# Altium PCB Main_Controller.PcbDoc (part 1 of 2)
Units mil, origin at the board's own origin, x right, y up, seen from the top; angles counter-clockwise.
Board outline 1790 x 1950 mil, 2 copper layers (Top Layer, Bottom Layer); 84 components, 64 nets, 348 pads, 50 vias.
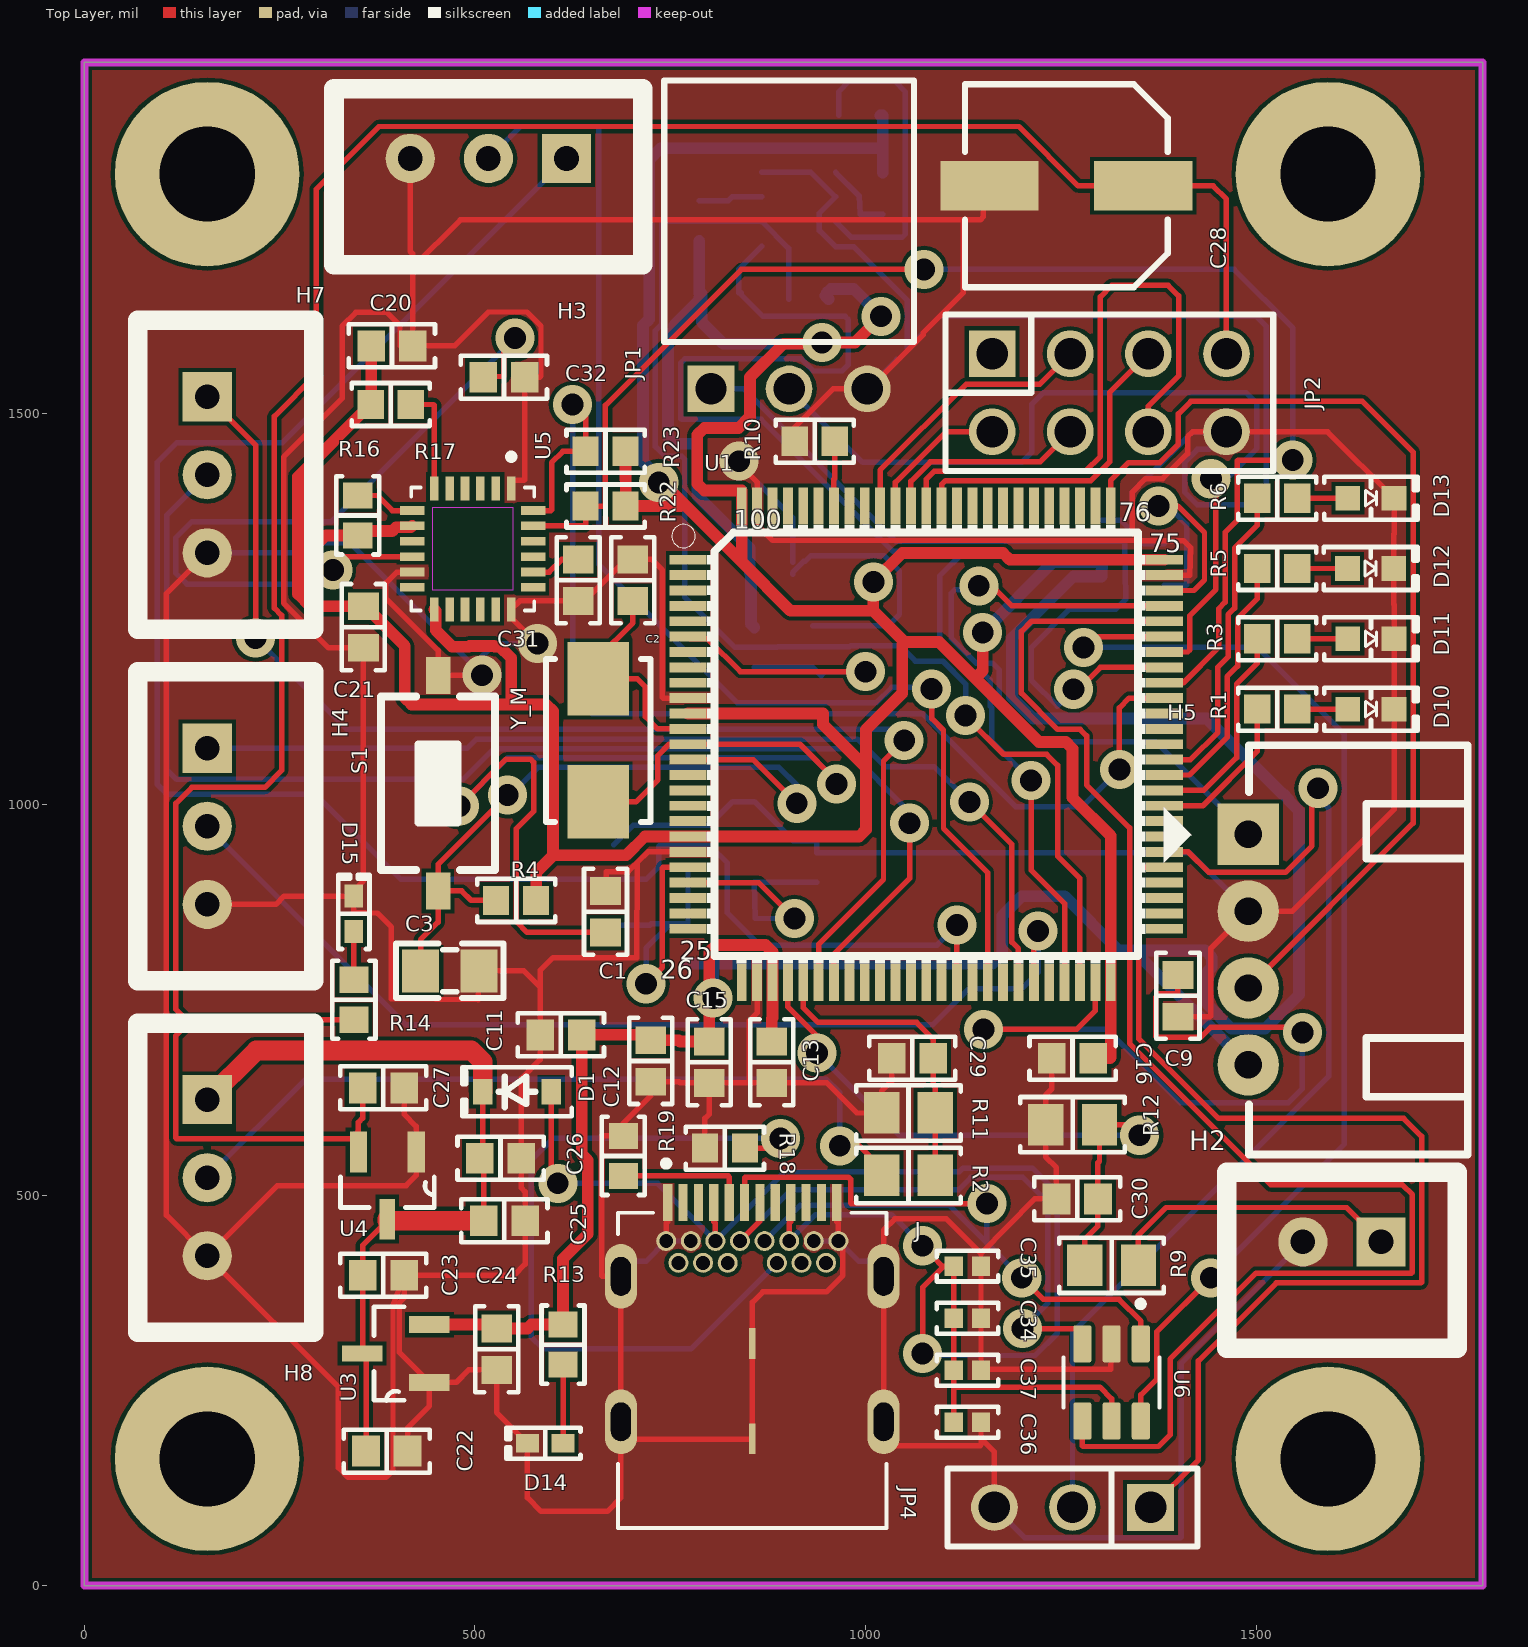
[diagram p0: Top Layer view]
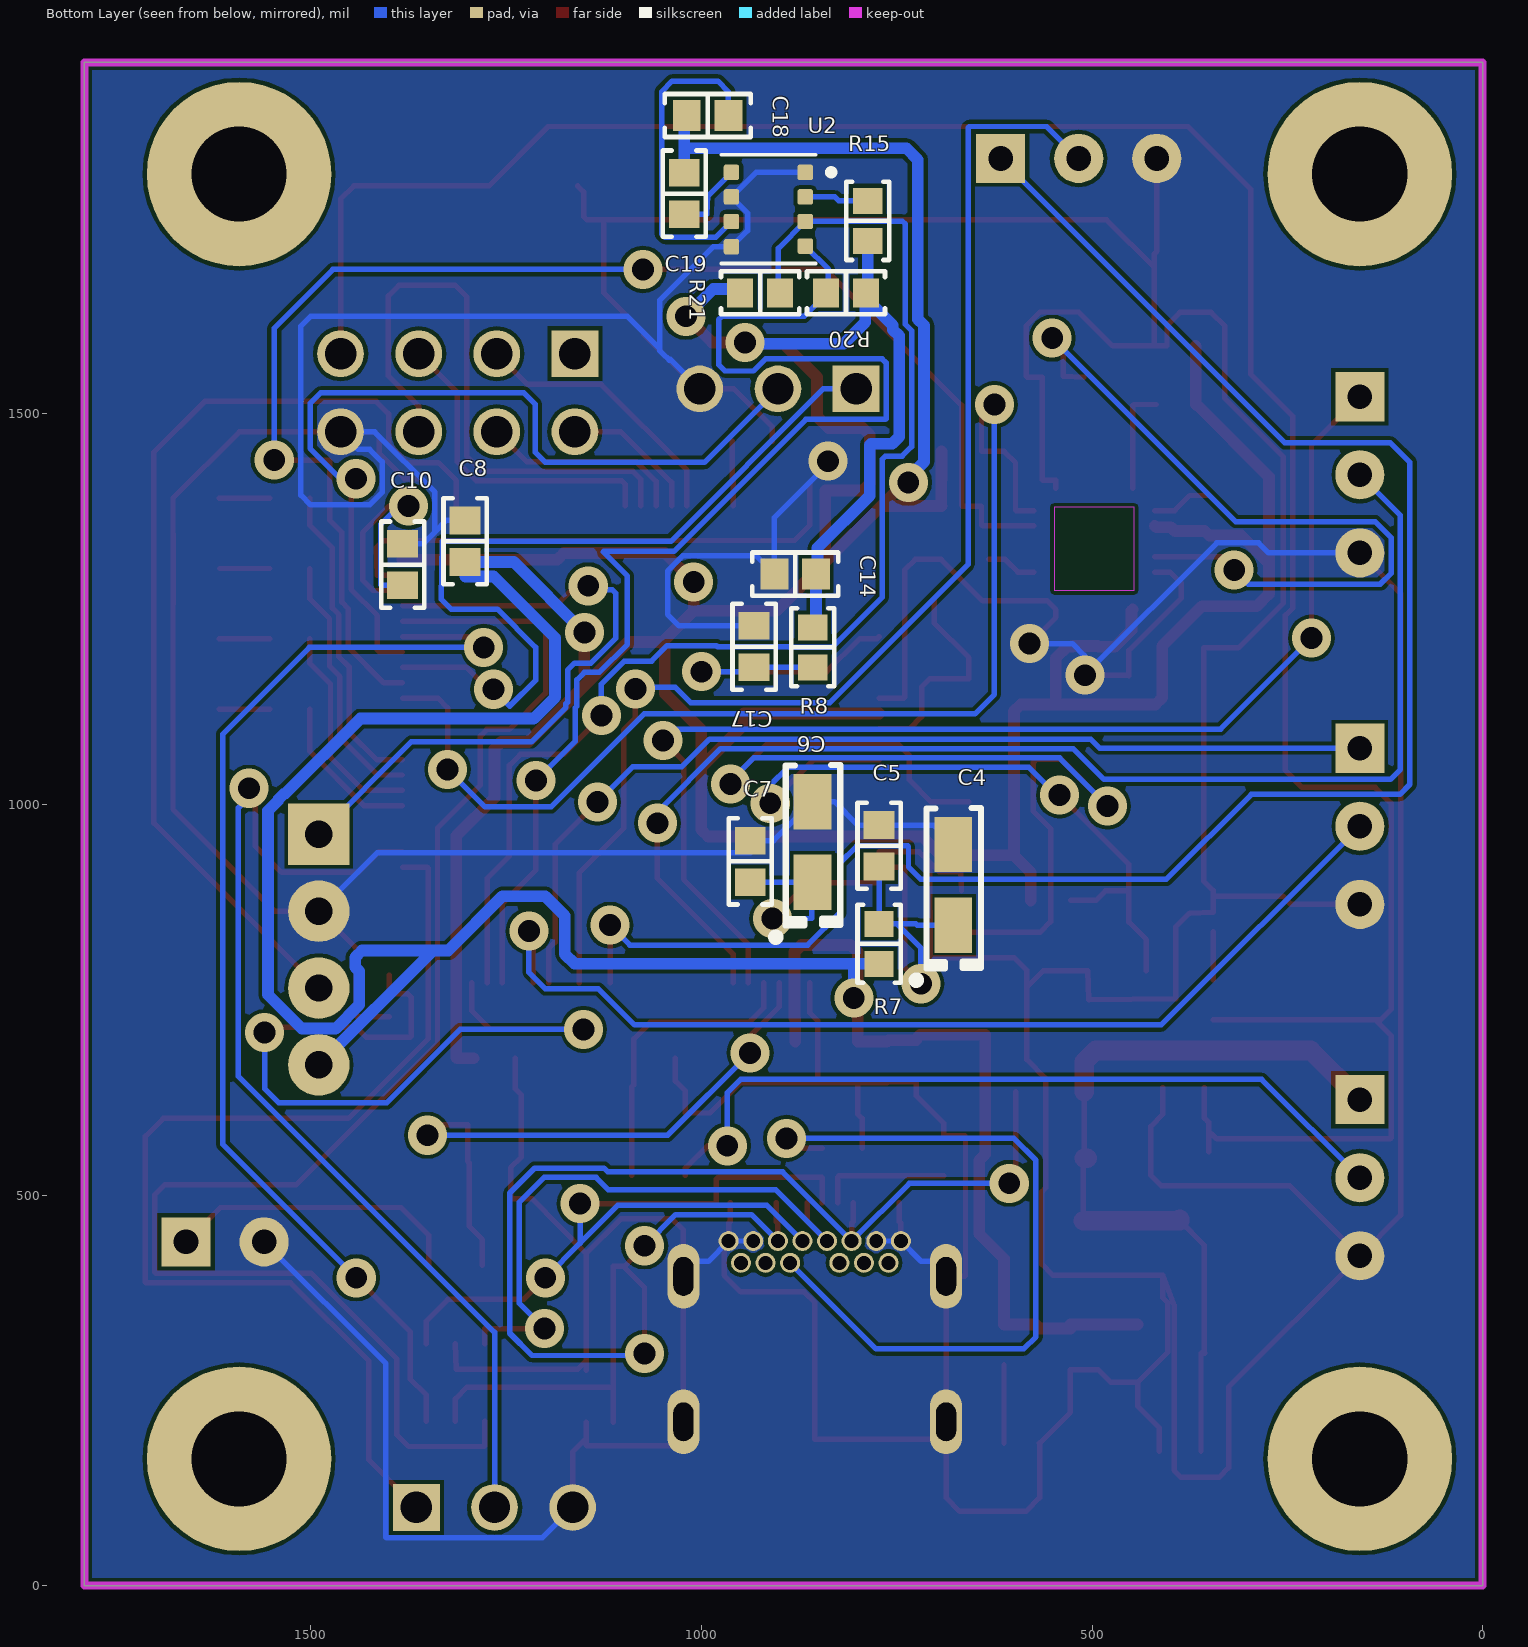
[diagram p1: Bottom Layer view, seen from below]
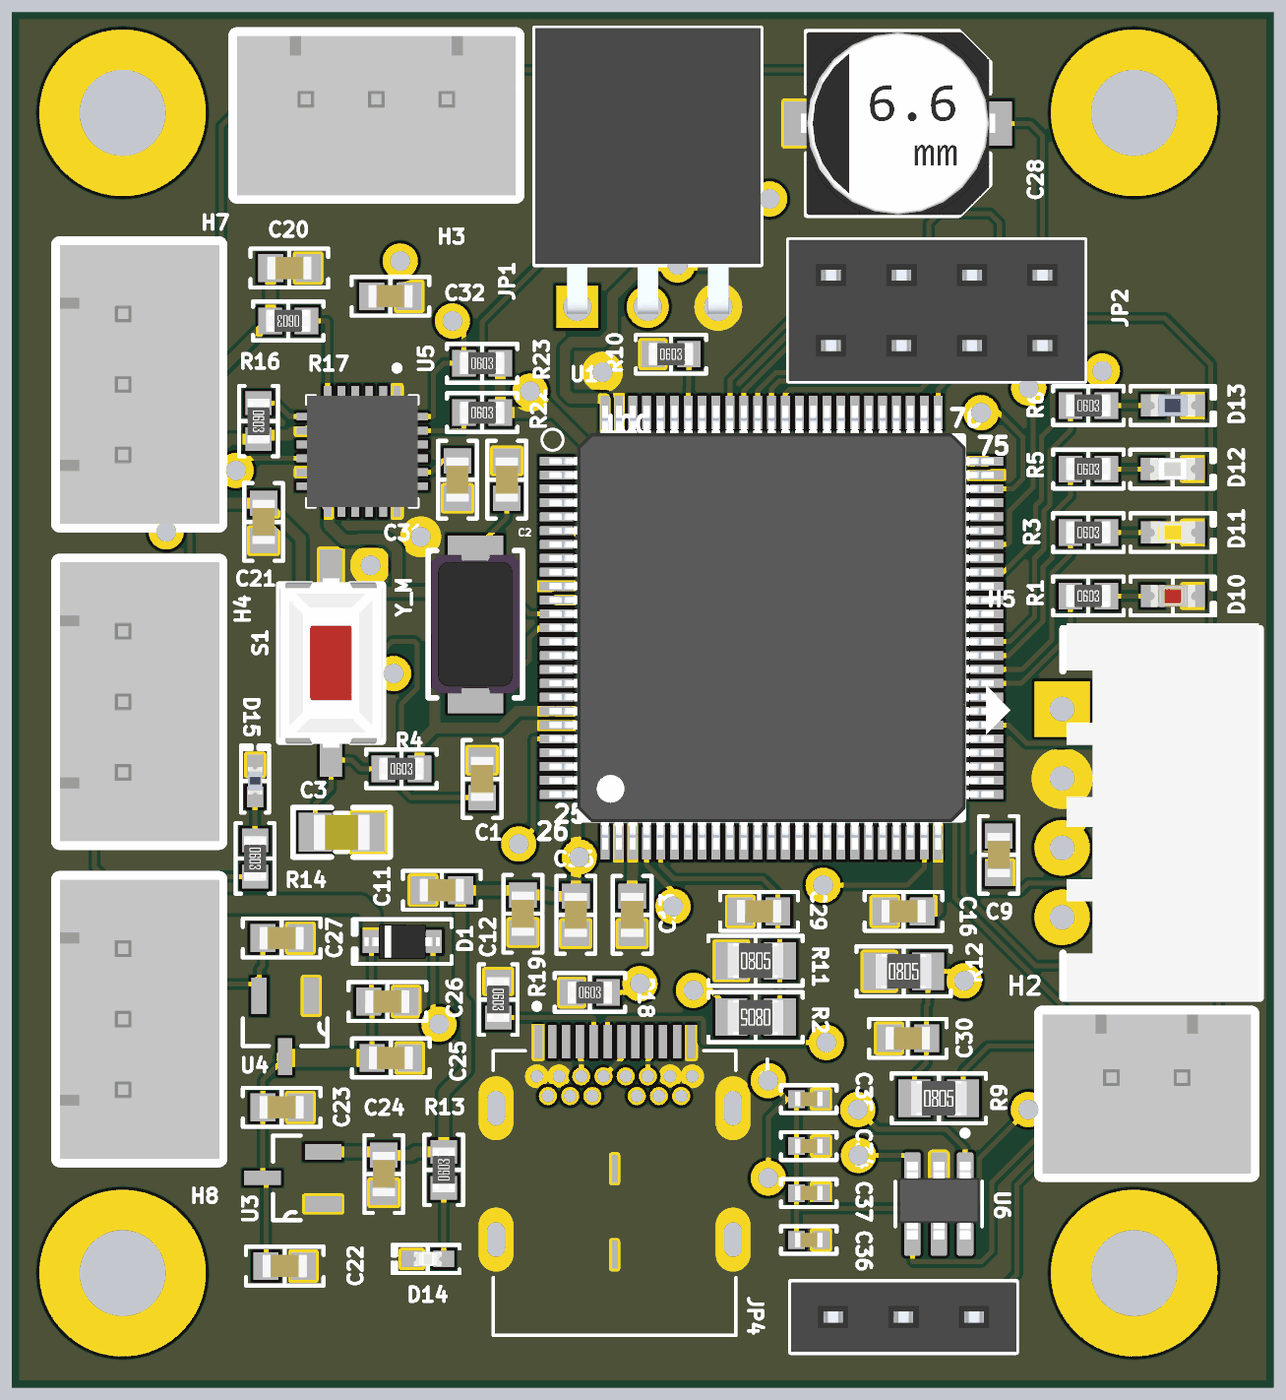
[diagram p2: 3D render of the assembled board from above, using the file's embedded part models]
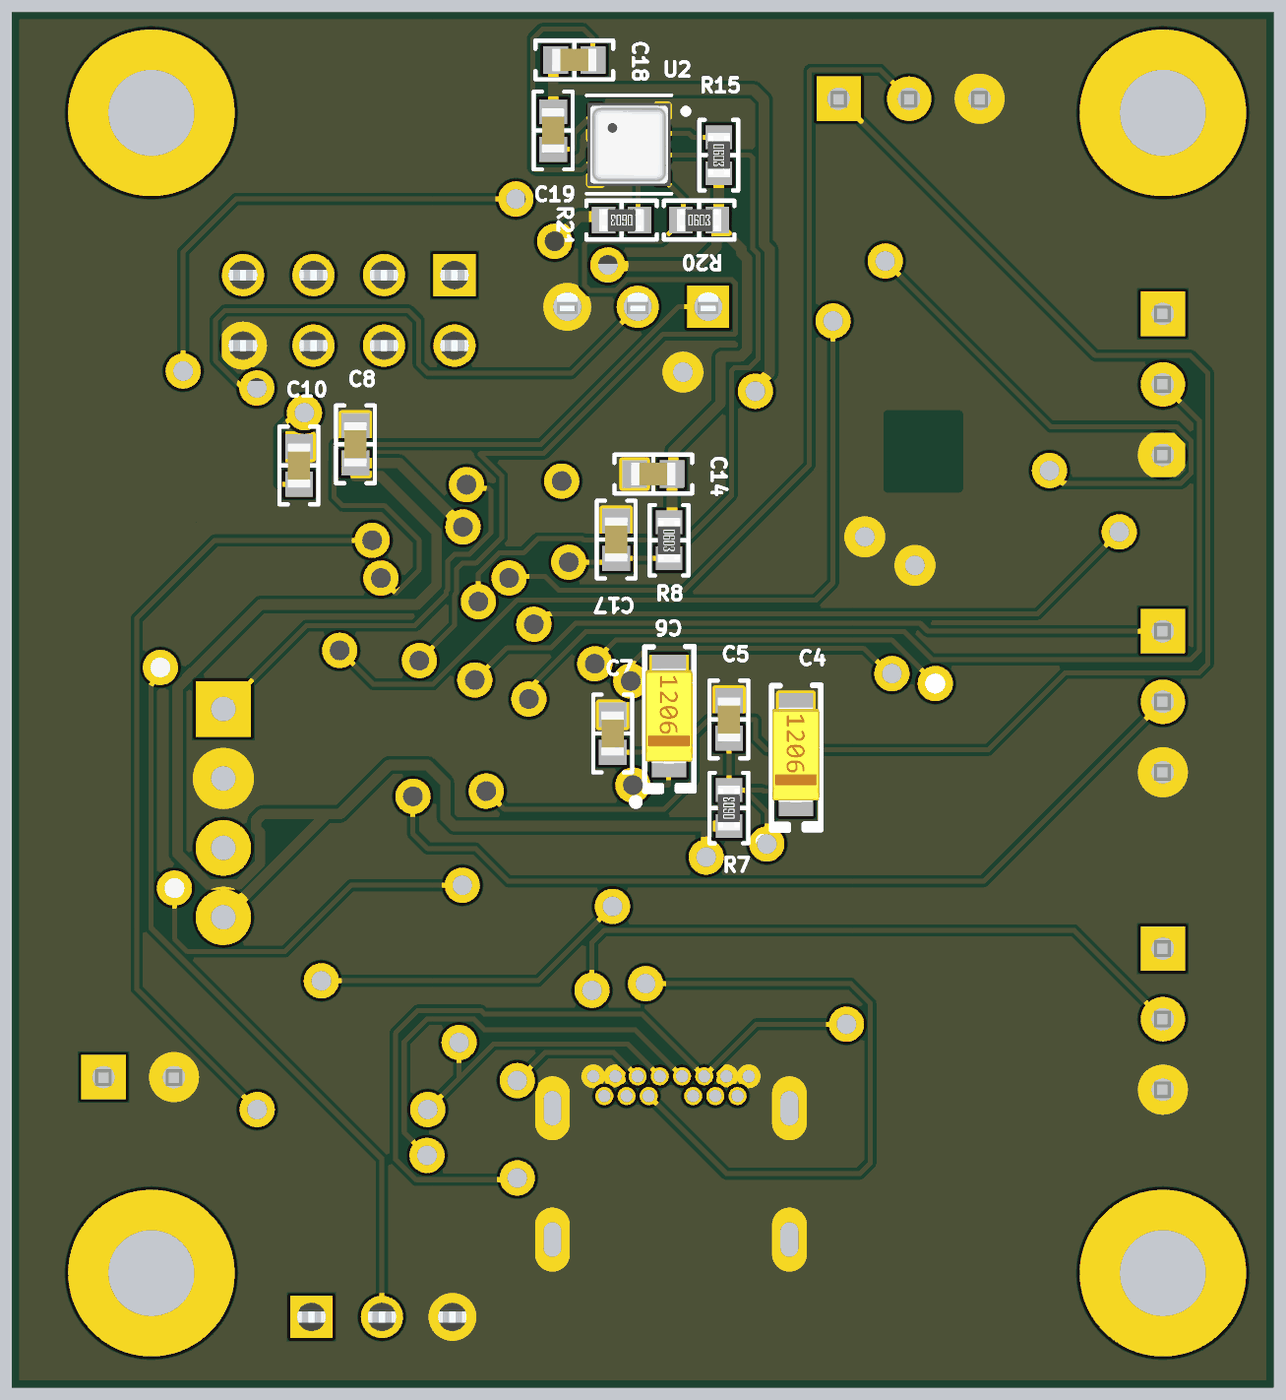
[diagram p3: 3D render of the assembled board from below, using the file's embedded part models]

## Layer stack, top to bottom
Top Solder: solder mask 0.4, Solder Resist, Dk 3.5
Top Layer: signal copper 1.4
Dielectric 1: dielectric 12.6, FR-4, Dk 4.8
Bottom Layer: signal copper 1.4
Bottom Solder: solder mask 0.4, Solder Resist, Dk 3.5

## Board outline
0,0 0,1950 1790,1950 1790,0

## Design rules (kind name [scope] priority, off if disabled: settings)
Clearance [All] p1: gap=5 ignorepadtopadclearanceinfootprint=FALSE
PolygonConnect PolygonConnect_2 [All vs IsNamedPolygon('GND_L02_P001')] p1: connectstyle=Direct reliefconductorwidth=10 reliefentries=4 polygonreliefangle="90 Angle" airgapwidth=10
PolygonConnect PolygonConnect_1 [All vs IsNamedPolygon('GND_L01_P000')] p2: connectstyle=Direct reliefconductorwidth=10 reliefentries=4 polygonreliefangle="90 Angle" airgapwidth=10
PolygonConnect [All] p3: connectstyle=Relief reliefconductorwidth=10 reliefentries=4 polygonreliefangle="90 Angle" airgapwidth=10
RoutingVias [All] p1: holewidth=28 width=50 viastyle="Through Hole" minholewidth=28 minwidth=50 maxholewidth=28 maxwidth=50
SolderMaskExpansion [All] p1: expansion=4 istentingtop=FALSE
Width [All] p1: maxlimit=30 minlimit=7 preferedwidth=7 minimp=50.000000 maximp=50.000000 favimp=50.000000
30 further rules are at their usual default settings.

## Classes and differential pairs
component class Sensor: C18 C19 C20 C21 C31 C32 C34 C35 C36 C37 D1 J R15 R16 R17 R18 R19 R20 R21 R22 R23 U2 U5 U6
component class Power_Supply: C22 C23 C24 C25 C26 C27 D14 D15 R13 R14 U3 U4
component class MCU: C1 C2 C3 C4 C5 C6 C7 C8 C9 C10 C11 C12 C14 C15 C16 C17 C29 C30 D10 D11 D12 D13 R1 R2 R3 R4 R5 R6 R7 R8 R9 R10 R11 R12 S1 U1 Y_M
component class Connector: C28 H2 H3 H4 H5 H7 H8 JP1 JP2 JP4

## Components (designator, comment, footprint, x,y, rotation, side; value= is the part's Value field where it differs from the comment)
C1 "20 pF" "CAP 0603_1608" 667.11,862.72 r270 top
C2 "20 pF" "CAP 0603_1608" 702.11,1287.11 r270 top
C3 "20pF" "tu 0805" 467.7,787.11 r0 top
C4 "1µF" "CAP POL 1206_3216" 677.7,897.11 r90 bottom
C5 "0.1 µF" "CAP 0603_1608" 772.7,947.11 r270 bottom
C6 "1µF" "CAP POL 1206_3216" 857.7,952.11 r90 bottom
C7 "0.1 µF" "CAP 0603_1608" 937.7,927.11 r90 bottom
C8 "0.1 µF" "CAP 0603_1608" 1302.7,1337.11 r270 bottom
C9 "2.2 µF" "CAP 0603_1608" 1400,755 r90 top
C10 "2.2 µF" "CAP 0603_1608" 1382.7,1307.11 r270 bottom
C11 "=Value" "CAP 0603_1608" 610,705 r0 top
C12 "0.1 µF" "CAP 0603_1608" 725,671.57 r90 top
C13 "=Value" "CAP 0603_1608" 880,670 r90 top
C14 "=Value" "CAP 0603_1608" 880,1295 r180 bottom
C15 "0.1 µF" "CAP 0603_1608" 800,670 r90 top
C16 "0.1 µF" "CAP 0603_1608" 1265,675 r0 top
C17 "1 µF" "CAP 0603_1608" 932.7,1202.11 r270 bottom
C18 "0.1 µF" "CAP 0603_1608" 992.11,1882.11 r0 bottom
C19 "0.1 µF" "CAP 0603_1608" 1022.11,1782.11 r90 bottom
C20 "0.1 µF" "CAP 0603_1608" 393.69,1587.11 r180 top
C21 "0.1 µF" "CAP 0603_1608" 357.11,1227.11 r270 top
C22 "10 µF" "CAP 0603_1608" 387.08,172.11 r180 top
C23 "0.1µF" "CAP 0603_1608" 382.7,397.11 r180 top
C24 "10 µF" "CAP 0603_1608" 527.7,302.61 r90 top
C25 "10 µF" "CAP 0603_1608" 537.7,467.11 r180 top
C26 "0.1µF" "CAP 0603_1608" 532.7,547.11 r180 top
C27 "10 µF" "CAP 0603_1608" 382.7,637.11 r180 top
C28 "220 µF" "CAP ALSMD 6.6MM H6.1MM" 1257.11,1792.11 r180 top
C29 "0.1 µF" "CAP 0603_1608" 1060,675 r0 top
C30 "0.1 µF" "CAP 0603_1608" 1271.02,495 r0 top
C31 "220 pF" "CAP 0603_1608" 632.11,1287.11 r90 top
C32 "0.1 µF" "CAP 0603_1608" 537.11,1547.11 r180 top
C34 "0.1 µF" "CAP 0402_1005" 1130.54,342.25 r0 top
C35 "0.1 µF" "CAP 0402_1005" 1130.54,408.87 r0 top
C36 "0.1 µF" "CAP 0402_1005" 1130.54,209.02 r0 top
C37 "0.1 µF" "CAP 0402_1005" 1130.54,275.63 r0 top
D1 "BAT60JFILM" SOD323 553.86,632.11 r180 top
D10 "Red" "LED 0603_1608 RED" 1647.11,1122.11 r0 top
D11 "Yellow" "LED 0603_1608 YELLOW" 1647.11,1212.11 r0 top
D12 "Green" "LED 0603_1608 GREEN" 1646.64,1302.11 r0 top
D13 "Blue" "LED 0603_1608 BLUE" 1647.11,1392.11 r0 top
D14 "Yellow" "LED 0402_1005 YELLOW" 590.06,182.11 r180 top
D15 "Blue" "LED 0402_1005 BLUE" 345,860 r90 top
H2 "Header 2P 2.54 Duc Thang" XH2.54M-2 1660,440 r180 top
H3 "Header 3P 2.54 Duc Thang" XH2.54M-3 617.11,1827.11 r180 top
H4 "Header 3P 2.54 Duc Thang" XH2.54M-3 157.11,1072.11 r270 top
H5 "Header 4P 2.54 Duc Cong" "Header 4P DC 2.54" 1491,960.85 r0 top
H7 "Header 3P 2.54 Duc Thang" XH2.54M-3 157.11,1522.11 r270 top
H8 "Header 3P 2.54 Duc Thang" XH2.54M-3 157.11,622.11 r270 top
J "SS-52400-002" BELFUSE_SS-52400-002 855,209.61 r0 top
JP1 "JP 1x3 2.54" "JP 1x3 CC" 902.11,1532.11 r0 top
JP2 "JP 2x4 2.54" "JP 2x4 CT" 1312.11,1527.11 r0 top
JP4 "JP 1x3 2.54" "JP 1x3 CT" 1365,100 r180 top
R1 "680 Ohms" "RES 0603_1608" 1527.11,1122.11 r0 top
R2 "33 kOhms" "RES 0805_2012" 1055,525 r180 top
R3 "680 Ohms" "RES 0603_1608" 1527.11,1212.11 r0 top
R4 "10 kOhms" "RES 0603_1608" 552.7,877.11 r0 top
R5 "680 Ohms" "RES 0603_1608" 1527.11,1302.11 r0 top
R6 "680 Ohms" "RES 0603_1608" 1527.11,1392.11 r0 top
R7 "47 Ohms" "RES 0603_1608" 772.7,821.52 r90 bottom
R8 "0 Ohms" "RES 0603_1608" 857.7,1201.13 r270 bottom
R9 "47.5 kOhms" "RES 0805_2012" 1315,410 r0 top
R10 "10 kOhms" "RES 0603_1608" 935,1465 r0 top
R11 "10 kOhms" "RES 0805_2012" 1055,605 r0 top
R12 "10 kOhms" "RES 0805_2012" 1265.1,590 r0 top
R13 "680 Ohms" "RES 0603_1608" 612.7,308.52 r90 top
R14 "680 Ohms" "RES 0603_1608" 345,750 r270 top
R15 "10 kOhms" "RES 0603_1608" 787.11,1747.11 r270 bottom
R16 "4.7 kOhms" "RES 0603_1608" 350,1370 r270 top
R17 "4.7 kOhms" "RES 0603_1608" 392.11,1512.11 r180 top
R18 "5.11 Ohms" "RES 0603_1608" 820,560 r0 top
R19 "5.11 Ohms" "RES 0603_1608" 690,550 r270 top
R20 "4.7 kOhms" "RES 0603_1608" 815,1655 r180 bottom
R21 "4.7 kOhms" "RES 0603_1608" 925,1655 r0 bottom
R22 "4.7 kOhms" "RES 0603_1608" 667.11,1382.11 r0 top
R23 "4.7 kOhms" "RES 0603_1608" 667.11,1452.11 r0 top
S1 "SW-SMD" SW-SMD 452.7,1027.11 r270 top
U1 "MCU-STM32F407VET6(LQFP100)" LQFP100-0.5-13.8X13.8MM 1077.7,1077.11 r0 top
U2 "BME680" PSON80P300X300X100-8N 914.43,1762.11 r180 bottom
U3 "MCP1700T-3302E/TT" SOT95P237X112-3N 398.58,297.11 r180 top
U4 "MCP1700T-3302E/TT" SOT95P237X112-3N 387.7,512.11 r270 top
U5 "MPU-6050" QFN50P400X400X95-24N 497.11,1327.11 r270 top
U6 "USBLC6-2SC6" SOT95P280X145-6N 1315,260 r270 top
Y_M "8 MHz" "NDK NX5032GA" 657.7,1082.11 r90 top

## Footprints (in the part's own frame and the unit in brackets; to place one, negate y for a bottom-side part, rotate by r counter-clockwise, add the part's x,y. Pads: shape width x height; smd on the part's side, far side on the other; paste and mask are expansions set on the pad)
BELFUSE_SS-52400-002 [mm]
  rect 0.3x1.2 smd: A1(-2.75,7.13) A2(-2.25,7.13) A3(-1.75,7.13) A4(-1.25,7.13) A5(-0.75,7.13) A6(-0.25,7.13) A7(0.25,7.13) A8(0.75,7.13) A9(1.25,7.13) A10(1.75,7.13) A11(2.25,7.13) A12(2.75,7.13)
  round 0.65 hole 0.45: B1(2.8,5.88) B2(2.4,5.17) B3(1.6,5.17) B4(1.2,5.88) B5(0.8,5.17) B6(0.4,5.88) B7(-0.4,5.88) B8(-0.8,5.17) B9(-1.2,5.88) B10(-1.6,5.17) B11(-2.4,5.17) B12(-2.8,5.88) G1(2,5.88) G2(-2,5.88)
  rect 0.2x1 smd: G3(0,2.55) G4(0,-0.55)
  oval 1.05x2.1 hole 0.65 slot 1.25 at 90 deg: S1(-4.27,4.73) S2(4.27,4.73) S3(-4.27,0) S4(4.27,0)
  silkscreen extent -4.37,-3.45 4.37,8.5
"CAP 0402_1005" [mm] "Chip Capacitor, 2-Leads, Body 1.02x0.51mm, IPC Medium Density"
  rect 0.6x0.64 smd: 1(-0.44,0) 2(0.44,0)
  silkscreen extent -1,-0.5 1,0.5, body extent -0.5,-0.26 0.5,0.26, height 0.52
"CAP 0603_1608" [mm] "Chip Capacitor, 2-Leads, Body 1.60x0.80mm, IPC Medium Density"
  rect 0.9x1 smd: 1(-0.675,0) 2(0.675,0)
  silkscreen extent -1.4,-0.7 1.4,0.7, body extent -0.8,-0.41 0.8,0.41, height 0.82
"CAP ALSMD 6.6MM H6.1MM" [mm] "Aluminum Electrolytic Capacitor, Body 6.60x6.60x6.10mm, IPC Low Density"
  rect 3.2x1.6 smd: 1(-2.5,0) 2(2.5,0)
  silkscreen extent -3.3,-3.3 3.3,3.3, body extent -3.5,-3.3 3.5,3.3, height 6.1
"CAP POL 1206_3216" [mm] "Molded Capacitor, 2-Leads, Body 3.20x1.6mm, IPC Medium Density"
  rect 1.8x1.23 smd: 1(-1.31,0) 2(1.31,0)
  silkscreen extent -3.22,-0.9 2.5,1.33, body extent -1.72,-0.85 1.71,0.85, height 1.7
"Header 4P DC 2.54" [mil]
  rect 78.74x78.74 hole 35: 1(-1,1)
  round 78.74 hole 35: 2(-1,-97.42) 3(-1,-195.85) 4(-1,-294.28)
  silkscreen extent -110,-409 280,115, body extent 5,-413 278,123, height 290
"JP 1x3 CC" [mm] "JP 1x3 CC"
  rect 1.52x1.52 hole 1.02: 1(-2.54,0)
  round 1.52 hole 1.02: 2(0,0) 3(2.54,0)
  silkscreen extent -4.06,1.52 4.06,10.03, body extent -4.06,-0.25 4.06,10.05, height 2.51
"JP 1x3 CT" [mm]
  rect 1.52x1.52 hole 1.02: 1(0,0)
  round 1.52 hole 1.02: 2(2.54,0) 3(5.08,0)
  silkscreen extent -1.52,-1.27 6.6,1.27, body extent -1.52,-1.25 6.6,1.25, height 8.51
"JP 2x4 CT" [mm] "8 pins, dual row, straight, gold plating"
  rect 1.52x1.52 hole 1.02: 1(-3.81,1.27)
  round 1.52 hole 1.02: 2(-1.27,1.27) 3(1.27,1.27) 4(3.81,1.27) 5(3.81,-1.27) 6(1.27,-1.27) 7(-1.27,-1.27) 8(-3.81,-1.27)
  silkscreen extent -5.33,-2.54 5.33,2.54, body extent -5.33,-2.54 5.33,2.54, height 8.51
"LED 0402_1005 BLUE" [mm] "Chip Diode, 2-Leads, Body 1.00x0.50mm, IPC Medium Density"
  rect 0.75x0.6 smd: 1(-0.575,0) 2(0.575,0)
  silkscreen extent -1.14,-0.51 1.27,0.51, body extent -0.5,-0.25 0.5,0.25, height 0.21
"LED 0402_1005 YELLOW" [mm] "Chip Diode, 2-Leads, Body 1.00x0.50mm, IPC Medium Density"
  rect 0.75x0.6 smd: 1(-0.575,0) 2(0.575,0)
  silkscreen extent -1.14,-0.51 1.27,0.51, body extent -0.5,-0.25 0.5,0.25, height 0.21
"LED 0603_1608 BLUE" [mm] "Chip Diode, 2-Leads, Body 1.60x0.80mm, IPC Medium Density"
  rect 0.8x0.8 smd: 1(-0.75,0) 2(0.75,0)
  silkscreen extent -1.52,-0.7 1.52,0.7, body extent -0.8,-0.4 0.8,0.4, height 0.53
"LED 0603_1608 GREEN" [mm] "Chip Diode, 2-Leads, Body 1.60x0.80mm, IPC Medium Density"
  rect 0.8x0.8 smd: 1(-0.75,0) 2(0.75,0)
  silkscreen extent -1.52,-0.7 1.52,0.7, body extent -0.8,-0.4 0.8,0.4, height 0.53
"LED 0603_1608 RED" [mm] "Chip Diode, 2-Leads, Body 1.60x0.80mm, IPC Medium Density"
  rect 0.8x0.8 smd: 1(-0.75,0) 2(0.75,0)
  silkscreen extent -1.52,-0.7 1.52,0.7, body extent -0.8,-0.4 0.8,0.4, height 0.53
"LED 0603_1608 YELLOW" [mm] "Chip Diode, 2-Leads, Body 1.60x0.80mm, IPC Medium Density"
  rect 0.8x0.8 smd: 1(-0.75,0) 2(0.75,0)
  silkscreen extent -1.52,-0.7 1.52,0.7, body extent -0.8,-0.4 0.8,0.4, height 0.53
LQFP100-0.5-13.8X13.8MM [mm]
  rect 1.2x0.32 smd: 1(-7.75,6) 2(-7.75,5.5) 3(-7.75,5) 4(-7.75,4.5) 5(-7.75,4) 6(-7.75,3.5) 7(-7.75,3) 8(-7.75,2.5) 9(-7.75,2) 10(-7.75,1.5) 11(-7.75,1) 12(-7.75,0.5) 13(-7.75,0) 14(-7.75,-0.5) 15(-7.75,-1) 16(-7.75,-1.5) 17(-7.75,-2) 18(-7.75,-2.5) 19(-7.75,-3) 20(-7.75,-3.5) 21(-7.75,-4) 22(-7.75,-4.5) 23(-7.75,-5) 24(-7.75,-5.5) 25(-7.75,-6) 51(7.75,-6) 52(7.75,-5.5) 53(7.75,-5) 54(7.75,-4.5) 55(7.75,-4) 56(7.75,-3.5) 57(7.75,-3) 58(7.75,-2.5) 59(7.75,-2) 60(7.75,-1.5) 61(7.75,-1) 62(7.75,-0.5) 63(7.75,0) 64(7.75,0.5) 65(7.75,1) 66(7.75,1.5) 67(7.75,2) 68(7.75,2.5) 69(7.75,3) 70(7.75,3.5) 71(7.75,4) 72(7.75,4.5) 73(7.75,5) 74(7.75,5.5) 75(7.75,6)
  rect 0.32x1.2 smd: 26(-6,-7.75) 27(-5.5,-7.75) 28(-5,-7.75) 29(-4.5,-7.75) 30(-4,-7.75) 31(-3.5,-7.75) 32(-3,-7.75) 33(-2.5,-7.75) 34(-2,-7.75) 35(-1.5,-7.75) 36(-1,-7.75) 37(-0.5,-7.75) 38(0,-7.75) 39(0.5,-7.75) 40(1,-7.75) 41(1.5,-7.75) 42(2,-7.75) 43(2.5,-7.75) 44(3,-7.75) 45(3.5,-7.75) 46(4,-7.75) 47(4.5,-7.75) 48(5,-7.75) 49(5.5,-7.75) 50(6,-7.75) 76(6,7.75) 77(5.5,7.75) 78(5,7.75) 79(4.5,7.75) 80(4,7.75) 81(3.5,7.75) 82(3,7.75) 83(2.5,7.75) 84(2,7.75) 85(1.5,7.75) 86(1,7.75) 87(0.5,7.75) 88(0,7.75) 89(-0.5,7.75) 90(-1,7.75) 91(-1.5,7.75) 92(-2,7.75) 93(-2.5,7.75) 94(-3,7.75) 95(-3.5,7.75) 96(-4,7.75) 97(-4.5,7.75) 98(-5,7.75) 99(-5.5,7.75) 100(-6,7.75)
  silkscreen extent -8.27,-7.13 7.11,7.15, body extent -8,-8 8,8, height 1.6
"NDK NX5032GA" [mm] "Crystal, 2-Leads, Body 5.00x3.20mm, IPC Medium Density"
  rect 2.4x2 smd: 1(-2,0) 2(2,0)
  silkscreen extent -2.65,-1.7 2.65,1.7, body extent -2.5,-1.6 2.5,1.6, height 1.2
PSON80P300X300X100-8N [mm]
  rrect25% 0.5x0.5 smd: 1(1.2,1.2) 2(1.2,0.4) 3(1.2,-0.4) 4(1.2,-1.2) 5(-1.2,-1.22) 6(-1.2,-0.4) 7(-1.2,0.4) 8(-1.2,1.2)
  silkscreen extent -1.53,-1.77 2.14,1.77, body extent -1.5,-1.5 1.5,1.5, height 1
QFN50P400X400X95-24N [mm]
  rect 0.79x0.28 smd: 1(-1.97,1.25) 2(-1.97,0.75) 3(-1.97,0.25) 4(-1.97,-0.25) 5(-1.97,-0.75) 6(-1.97,-1.25) 13(1.97,-1.25) 14(1.97,-0.75) 15(1.97,-0.25) 16(1.97,0.25) 17(1.97,0.75) 18(1.97,1.25)
  rect 0.28x0.79 smd: 7(-1.25,-1.97) 8(-0.75,-1.97) 9(-0.25,-1.97) 10(0.25,-1.97) 11(0.75,-1.97) 12(1.25,-1.97) 19(1.25,1.97) 20(0.75,1.97) 21(0.25,1.97) 22(-0.25,1.97) 23(-0.75,1.97) 24(-1.25,1.97)
  Keep-Out Layer region: 1.35,-1.3 -1.35,-1.3 -1.35,1.3 1.35,1.3
  silkscreen extent -3.1,-2 2,2, body extent -2,-2 2,2, height 0.93
"RES 0603_1608" [mm] "Chip Resistor, 2-Leads, Body 1.60x0.80mm, IPC Medium Density"
  rect 0.85x0.95 smd: 1(-0.65,0) 2(0.65,0)
  silkscreen extent -1.27,-0.7 1.27,0.7, body extent -0.8,-0.4 0.8,0.4, height 0.45
"RES 0805_2012" [mm] "Chip Resistor, 2-Leads, Body 2.00x1.25mm, IPC Medium Density"
  rect 1.15x1.35 smd: 1(-0.875,0) 2(0.875,0)
  silkscreen extent -1.7,-0.9 1.7,0.9, body extent -1,-0.62 1,0.63, height 0.6
SOD323 [mm] "SOD, 2-Leads, Body 1.25x2.50mm, IPC Medium Density"
  rect 0.625x0.83 smd: 1(-1.112,0) 2(1.112,0)
  silkscreen extent -1.78,-0.8 1.78,0.8, body extent -1.36,-0.62 1.36,0.62, height 1.05
SOT95P237X112-3N [mil]
  rect 52x22 smd: 1(-43,37) 2(-43,-37)
  rect 52x20 smd: 3(43,0)
  silkscreen extent -11,-60 28,60
SOT95P280X145-6N [mm]
  rrect25% 1.21x0.59 smd: 1(-1.255,0.95) 2(-1.255,0) 3(-1.255,-0.95) 4(1.255,-0.95) 5(1.255,0) 6(1.255,0.95)
  silkscreen extent -2.65,-1.56 0.81,1.56, body extent -1.53,-1.46 1.27,1.46, height 1.4
SW-SMD [mm] "Switch SMD type"
  rect 1.2x0.8 smd: 1(-3.5,0) 2(3.5,0)
  silkscreen extent -2.82,-1.85 2.82,1.85, body extent -3.05,-1.85 3.05,1.85, height 2.5
"tu 0805" [mm] "Compoment SMD 80x50mil"
  rect 1.2x1.4 smd: 1(-0.946,-0.003) 2(0.954,-0.003)
  silkscreen extent -1.75,-0.89 1.75,0.89, body extent -1.01,-0.64 1.01,0.63, height 0.61
XH2.54M-2 [mm]
  rect 1.6x1.6 hole 0.8: 1(0,0)
  round 1.6 hole 0.8: 2(2.54,0)
  silkscreen extent -2.48,-2.26 5.02,3.46, body extent -2.48,-2.26 5.02,3.48, height 6.91
XH2.54M-3 [mm]
  rect 1.6x1.6 hole 0.8: 1(0,0)
  round 1.6 hole 0.8: 2(2.54,0) 3(5.08,0)
  silkscreen extent -2.48,-2.26 7.56,3.46, body extent -2.48,-2.26 7.56,3.48, height 6.91

## Part data
C1 C2: library part C0603C200K8HAC7867, "CAP CER 20PF 10V X8R 0603", Device Package="0603 (1608 Metric)", Manufacturer=KEMET, Operating Temperature="-55°C ~ 150°C", Supplier Part Number 1=399-C0603C200K8HAC7867CT-ND, Temperature Coefficient=X8R, Tolerance=±10%, Voltage - Rated=10V, Applications="General Purpose", Capacitance="20 pF", componentlink1description=Datasheet, componentlink1url=https://connect.kemet.com:7667/gateway/IntelliData-ComponentDocumentation/1.0/download/datasheet/C0603C200K8HAC7867, componentlink2description="DigiKey Link", componentlink2url=https://www.digikey.com/en/products/detail/kemet/C0603C200K8HAC7867/7946748, Features="Low ESL, High Temperature", lastupdated="2/9/2024 8:09:18 PM", Lifecycle Status=Active, Minimum Order=1, Mounting Type="Surface Mount, MLCC", Package / Case="0603 (1608 Metric)", packaging=TapeAndReel, Part Number=C0603C200K8HAC7867, Part Status=Active, partid=52193, Price=0.01, series="SMD Comm X8R HT150C", Size / Dimension="0.063\" L x 0.031\" W (1.60mm x 0.80mm)", Supplier 1=DigiKey, Thickness (Max)="0.034\" (0.87mm)"
C3: library part "Tu 0805 20pF 50V 10%", "Dán", Chung_Loai=Dán, Don_Vi=Con, Ma_Hang=MH004558, So_Chan=2, Ten_Linh_Kien="Tụ 0805 20P 10% 50V"
C4 C6: library part TAJA105K016RNJ, "CAP TANT 1UF 10% 16V 1206", Device Package="1206 (3216 Metric)", ESR (Equivalent Series Resistance)=11Ohm, Manufacturer="AVX Corporation", Manufacturer Size Code=A, Operating Temperature="-55°C ~ 125°C", Supplier Part Number 1=478-1649-1-ND, Tolerance=±10%, Voltage - Rated=16V, Capacitance=1µF, componentlink1description=Datasheet, componentlink1url=http://datasheets.avx.com/TAJ.pdf, componentlink2description="DigiKey Link", componentlink2url=http://digikey.com/product-detail/en/avx-corporation/TAJA105K016RNJ/478-1649-1-ND/564681, Features="General Purpose", Height - Seated (Max)="0.071\" (1.80mm)", lastupdated="9/2/2020 1:15:58 AM", Lifecycle Status=Active, Minimum Order=1, Mounting Type="Surface Mount", Package / Case="1206 (3216 Metric)", packaging=TapeAndReel, Part Number=TAJA105K016RNJ, Part Status=Active, partid=368, Price=0.08, series=TAJ, Size / Dimension="0.126\" L x 0.063\" W (3.20mm x 1.60mm)", Supplier 1=DigiKey, Type=Molded
C5 C7 C8 C12 C15 C16: library part C0603C104M8RAC7867, "CAP CER 0.1UF 10V X7R 0603", Device Package="0603 (1608 Metric)", Manufacturer=KEMET, Operating Temperature="-55°C ~ 125°C", Supplier Part Number 1=399-C0603C104M8RAC7867CT-ND, Temperature Coefficient=X7R, Tolerance=±20%, Voltage - Rated=10V, Applications="Bypass, Decoupling", Capacitance="0.1 µF", componentlink1description=Datasheet, componentlink1url=https://api.kemet.com/component-edge/download/datasheet/C0603C104M8RACTU.pdf, componentlink2description="DigiKey Link", componentlink2url=https://www.digikey.com/en/products/detail/kemet/C0603C104M8RAC7867/2199783, lastupdated="2/9/2024 8:09:58 PM", Lifecycle Status=Active, Minimum Order=1, Mounting Type="Surface Mount, MLCC", Package / Case="0603 (1608 Metric)", packaging=TapeAndReel, Part Number=C0603C104M8RAC7867, Part Status=Active, partid=35470, Price=0.01, series="SMD Comm X7R", Size / Dimension="0.063\" L x 0.031\" W (1.60mm x 0.80mm)", Supplier 1=DigiKey, Thickness (Max)="0.034\" (0.87mm)"
C9 C10: library part KGM15BR51A225MT, "CAP CER 2.2UF 10V X5R 0603", Device Package="0603 (1608 Metric)", Manufacturer="KYOCERA AVX", Operating Temperature="-55°C ~ 85°C", Supplier Part Number 1=478-KGM15BR51A225MTCT-ND, Temperature Coefficient=X5R, Tolerance=±20%, Voltage - Rated=10V, Applications="General Purpose", Capacitance="2.2 µF", componentlink1description=Datasheet, componentlink1url=https://datasheets.kyocera-avx.com/cx5r.pdf, componentlink2description="DigiKey Link", componentlink2url=https://www.digikey.com/en/products/detail/kyocera-avx/KGM15BR51A225MT/1545053, lastupdated="2/9/2024 8:09:12 PM", Lifecycle Status=Active, Minimum Order=1, Mounting Type="Surface Mount, MLCC", Package / Case="0603 (1608 Metric)", packaging=TapeAndReel, Part Number=KGM15BR51A225MT, Part Status=Active, partid=53315, Price=0.02, series="KGM - X5R", Size / Dimension="0.063\" L x 0.031\" W (1.60mm x 0.80mm)", Supplier 1=DigiKey, Thickness (Max)="0.037\" (0.95mm)"
C11 C13 C14: library part C0603C104M8RAC7867, "CAP CER 0.1UF 10V X7R 0603", Capacitance="0.1 µF", Device Package="0603 (1608 Metric)", Manufacturer=KEMET, Operating Temperature="-55°C ~ 125°C", Supplier Part Number 1=399-C0603C104M8RAC7867CT-ND, Temperature Coefficient=X7R, Tolerance=±20%, Voltage - Rated=10V, Applications="Bypass, Decoupling", componentlink1description=Datasheet, componentlink1url=https://api.kemet.com/component-edge/download/datasheet/C0603C104M8RACTU.pdf, componentlink2description="DigiKey Link", componentlink2url=https://www.digikey.com/en/products/detail/kemet/C0603C104M8RAC7867/2199783, lastupdated="2/9/2024 8:09:58 PM", Lifecycle Status=Active, Minimum Order=1, Mounting Type="Surface Mount, MLCC", Package / Case="0603 (1608 Metric)", packaging=TapeAndReel, Part Number=C0603C104M8RAC7867, Part Status=Active, partid=35470, Price=0.01, series="SMD Comm X7R", Size / Dimension="0.063\" L x 0.031\" W (1.60mm x 0.80mm)", Supplier 1=DigiKey, Thickness (Max)="0.034\" (0.87mm)"
C17: library part C0603X105J8RAC7411, "CAP CER 0603 1UF 10V X7R 5%", Device Package="0603 (1608 Metric)", Manufacturer=KEMET, Operating Temperature="-55°C ~ 125°C", Supplier Part Number 1=399-C0603X105J8RAC7411CT-ND, Temperature Coefficient=X7R, Tolerance=±5%, Voltage - Rated=10V, Applications="Boardflex Sensitive", Capacitance="1 µF", componentlink1description=Datasheet, componentlink1url=https://connect.kemet.com:7667/gateway/IntelliData-ComponentDocumentation/1.0/download/datasheet/C0603X105J8RAC7411, componentlink2description="DigiKey Link", componentlink2url=https://www.digikey.com/en/products/detail/kemet/C0603X105J8RAC7411/8600943, Features="Soft Termination", lastupdated="2/9/2024 8:09:45 PM", Lifecycle Status=Active, Minimum Order=1, Mounting Type="Surface Mount, MLCC", Package / Case="0603 (1608 Metric)", packaging=TapeAndReel, Part Number=C0603X105J8RAC7411, Part Status=Active, partid=47461, Price=0.09, series="SMD Comm X7R Flex", Size / Dimension="0.063\" L x 0.031\" W (1.60mm x 0.80mm)", Supplier 1=DigiKey, Thickness (Max)="0.037\" (0.95mm)"
C18 C19 C20 C21 C32: library part C0603C104J8RAC7867, "CAP CER 0.1UF 10V X7R 0603", Device Package="0603 (1608 Metric)", Manufacturer=KEMET, Operating Temperature="-55°C ~ 125°C", Supplier Part Number 1=399-C0603C104J8RAC7867CT-ND, Temperature Coefficient=X7R, Tolerance=±5%, Voltage - Rated=10V, Applications="Bypass, Decoupling", Capacitance="0.1 µF", componentlink1description=Datasheet, componentlink1url=https://connect.kemet.com:7667/gateway/IntelliData-ComponentDocumentation/1.0/download/datasheet/C0603C104J8RACTU, componentlink2description="DigiKey Link", componentlink2url=https://www.digikey.com/en/products/detail/kemet/C0603C104J8RAC7867/2199774, lastupdated="2/9/2024 8:09:18 PM", Lifecycle Status=Active, Minimum Order=1, Mounting Type="Surface Mount, MLCC", Package / Case="0603 (1608 Metric)", packaging=TapeAndReel, Part Number=C0603C104J8RAC7867, Part Status=Active, partid=52171, Price=0.07, series="SMD Comm X7R", Size / Dimension="0.063\" L x 0.031\" W (1.60mm x 0.80mm)", Supplier 1=DigiKey, Thickness (Max)="0.034\" (0.87mm)"
C22 C24 C25 C27: library part KGM15CS60J106MT, "CAP CER 10UF 6.3V X6S 0603", Device Package="0603 (1608 Metric)", Manufacturer="KYOCERA AVX", Operating Temperature="-55°C ~ 105°C", Supplier Part Number 1=478-KGM15CS60J106MTCT-ND, Temperature Coefficient=X6S, Tolerance=±20%, Voltage - Rated=6.3V, Applications="General Purpose", Capacitance="10 µF", componentlink1description=Datasheet, componentlink1url=https://datasheets.kyocera-avx.com/x6s-dielectric.pdf, componentlink2description="DigiKey Link", componentlink2url=https://www.digikey.com/en/products/detail/kyocera-avx/KGM15CS60J106MT/17866394, lastupdated="2/9/2024 8:09:11 PM", Lifecycle Status=Active, Minimum Order=1, Mounting Type="Surface Mount, MLCC", Package / Case="0603 (1608 Metric)", packaging=TapeAndReel, Part Number=KGM15CS60J106MT, Part Status=Active, partid=53178, Price=0.03, series="KGM - X6S", Size / Dimension="0.063\" L x 0.031\" W (1.60mm x 0.80mm)", Supplier 1=DigiKey, Thickness (Max)="0.039\" (1.00mm)"
C23 C26: library part 0603YC104K4T4A, "CAP CER 0.1UF 16V X7R 0603", Device Package="0603 (1608 Metric)", Manufacturer="AVX Corporation", Operating Temperature="-55°C ~ 125°C", Ratings=AEC-Q200, Supplier Part Number 1=478-9382-1-ND, Temperature Coefficient=X7R, Tolerance=±10%, Voltage - Rated=16V, Applications=Automotive, Capacitance=0.1µF, componentlink1description=Datasheet, componentlink1url=http://datasheets.avx.com/AutoMLCC.pdf, componentlink2description="DigiKey Link", componentlink2url=http://digikey.com/product-detail/en/avx-corporation/0603YC104K4T4A/478-9382-1-ND/4901449, lastupdated="9/2/2020 1:03:04 AM", Lifecycle Status=Active, Minimum Order=1, Mounting Type="Surface Mount, MLCC", Package / Case="0603 (1608 Metric)", packaging=TapeAndReel, Part Number=0603YC104K4T4A, Part Status=Active, partid=17140, Price=0.02, series=-, Size / Dimension="0.063\" L x 0.032\" W (1.60mm x 0.81mm)", Supplier 1=DigiKey, Thickness (Max)="0.035\" (0.90mm)"
C28: library part UCM1A221MCL1GS, "CAP ALUM 220UF 20% 10V SMD", Device Package="Radial, Can - SMD", Lifetime @ Temp.="2000 Hrs @ 105°C", Manufacturer=Nichicon, Operating Temperature="-55°C ~ 105°C", Ratings=AEC-Q200, Ripple Current @ High Frequency="300 mA @ 100 kHz", Ripple Current @ Low Frequency="150 mA @ 120 Hz", Supplier Part Number 1=493-17470-1-ND, Tolerance=±20%, Voltage - Rated="10 V", Applications=Automotive, Capacitance="220 µF", componentlink1description=Datasheet, componentlink1url=http://nichicon-us.com/english/products/pdfs/e-ucm.pdf, componentlink2description="DigiKey Link", componentlink2url=https://www.digikey.com/en/products/detail/nichicon/UCM1A221MCL1GS/4991832, Height - Seated (Max)="0.240\" (6.10mm)", Impedance="260 mOhms", lastupdated="6/3/2024 8:16:09 PM", Lifecycle Status=Active, Minimum Order=1, Mounting Type="Surface Mount", Package / Case="Radial, Can - SMD", packaging=TapeAndReel, Part Number=UCM1A221MCL1GS, Part Status=Active, partid=27599, Polarization=Polar, Price=0.13, series=UCM, Size / Dimension="0.248\" Dia (6.30mm)", Supplier 1=DigiKey, Surface Mount Land Size="0.260\" L x 0.260\" W (6.60mm x 6.60mm)"
C29 C30: library part VJ0603Y104KXQCW1BC, "CAP CER 0.1UF 10V X7R 0603", Device Package="0603 (1608 Metric)", Manufacturer="Vishay Vitramon", Operating Temperature="-55°C ~ 125°C", Supplier Part Number 1=720-1689-1-ND, Temperature Coefficient=X7R, Tolerance=±10%, Voltage - Rated=10V, Applications="General Purpose", Capacitance="0.1 µF", componentlink1description=Datasheet, componentlink1url=https://www.vishay.com/docs/28548/vjw1bcbascomseries.pdf, componentlink2description="DigiKey Link", componentlink2url=https://www.digikey.com/en/products/detail/vishay-vitramon/VJ0603Y104KXQCW1BC/8305317, lastupdated="2/9/2024 8:10:06 PM", Lifecycle Status=Active, Minimum Order=1, Mounting Type="Surface Mount, MLCC", Package / Case="0603 (1608 Metric)", packaging=TapeAndReel, Part Number=VJ0603Y104KXQCW1BC, Part Status=Active, partid=17766, Price=0.02, series="VJ W1BC", Size / Dimension="0.063\" L x 0.031\" W (1.60mm x 0.80mm)", Supplier 1=DigiKey, Thickness (Max)="0.034\" (0.87mm)"
C31: library part KGM15AR71A221KT, "CAP CER 220PF 10V X7R 0603", Device Package="0603 (1608 Metric)", Manufacturer="KYOCERA AVX", Operating Temperature="-55°C ~ 125°C", Supplier Part Number 1=478-KGM15AR71A221KTCT-ND, Temperature Coefficient=X7R, Tolerance=±10%, Voltage - Rated=10V, Applications="General Purpose", Capacitance="220 pF", componentlink1description=Datasheet, componentlink1url=https://datasheets.kyocera-avx.com/X7RDielectric.pdf, componentlink2description="DigiKey Link", componentlink2url=https://www.digikey.com/en/products/detail/kyocera-avx/KGM15AR71A221KT/1600720, lastupdated="2/9/2024 8:09:12 PM", Lifecycle Status=Active, Minimum Order=1, Mounting Type="Surface Mount, MLCC", Package / Case="0603 (1608 Metric)", packaging=TapeAndReel, Part Number=KGM15AR71A221KT, Part Status=Active, partid=53248, Price=0.02, series="KGM - X7R", Size / Dimension="0.063\" L x 0.032\" W (1.60mm x 0.81mm)", Supplier 1=DigiKey, Thickness (Max)="0.035\" (0.90mm)"
C34 C35 C36 C37: library part KGM05AR71A104KH, "CAP CER 0.1UF 10V X7R 0402", Device Package="0402 (1005 Metric)", Manufacturer="KYOCERA AVX", Operating Temperature="-55°C ~ 125°C", Supplier Part Number 1=478-KGM05AR71A104KHCT-ND, Temperature Coefficient=X7R, Tolerance=±10%, Voltage - Rated=10V, Applications="General Purpose", Capacitance="0.1 µF", componentlink1description=Datasheet, componentlink1url=https://datasheets.kyocera-avx.com/X7RDielectric.pdf, componentlink2description="DigiKey Link", componentlink2url=https://www.digikey.com/en/products/detail/kyocera-avx/KGM05AR71A104KH/3080133, lastupdated="2/9/2024 8:03:47 PM", Lifecycle Status=Active, Minimum Order=1, Mounting Type="Surface Mount, MLCC", Package / Case="0402 (1005 Metric)", packaging=TapeAndReel, Part Number=KGM05AR71A104KH, Part Status=Active, partid=50766, Price=0.01, series="KGM - X7R", Size / Dimension="0.039\" L x 0.020\" W (1.00mm x 0.50mm)", Supplier 1=DigiKey, Thickness (Max)="0.022\" (0.55mm)"
D1: "DIODE SCHOTTKY 10V 3A SOD323", Current - Average Rectified (Io)=3A, Current - Reverse Leakage @ Vr="6 µA @ 10 V", Manufacturer=STMicroelectronics, Operating Temperature - Junction="150°C (Max)", Package / Case="SC-76, SOD-323", Supplier Device Package=SOD-323, Supplier Part Number 1=497-3707-1-ND, Voltage - DC Reverse (Vr) (Max)="10 V", Voltage - Forward (Vf) (Max) @ If="580 mV @ 1 A", componentlink1description=Datasheet, componentlink1url=http://www.st.com/content/ccc/resource/technical/document/datasheet/3d/d2/27/1d/20/e3/4d/48/CD00001944.pdf/files/CD00001944.pdf/jcr:content/translations/en.CD00001944.pdf, componentlink2description="DigiKey Link", componentlink2url=https://www.digikey.com/en/products/detail/stmicroelectronics/BAT60JFILM/686386, Diode Type=Schottky, lastupdated="6/3/2024 8:20:13 PM", Lifecycle Status=Active, Minimum Order=1, Mounting Type="Surface Mount", packaging=TapeAndReel, Part Number=BAT60JFILM, Part Status=Active, partid=3091, Price=0.04, series=-, Speed="Fast Recovery =< 500ns, > 200mA (Io)", Supplier 1=DigiKey
D10: library part 5975112402F, "LED RED DIFFUSED 0603 SMD", Current - Test=20mA, Device Package="0603 (1608 Metric)", Lens Color=White, Manufacturer=Dialight, Millicandela Rating=11.7mcd, Supplier Device Package=2-SMD, Supplier Part Number 1=350-2890-ND, Voltage - Forward (Vf) (Typ)=1.7V, Color=Red, componentlink1description=Datasheet, componentlink1url=http://www.dialightsignalsandcomponents.com/Assets/Brochures_And_Catalogs/Indication/597-xxxx-4xx.pdf, componentlink2description="DigiKey Link", componentlink2url=https://www.digikey.com/en/products/detail/dialight/5975112402F/2432586, Configuration=Standard, Height (Max)=0.70mm, lastupdated="6/3/2024 7:59:47 PM", Lens Size="1.10mm x 0.80mm", Lens Style="Rectangle with Flat Top", Lens Transparency=Diffused, Lifecycle Status=Active, Minimum Order=1, Mounting Type="Surface Mount", Package / Case="0603 (1608 Metric)", packaging=Strip, Part Number=5975112402F, Part Status=Active, partid=449, Price=0.24, series=597, Size / Dimension="1.60mm L x 0.80mm W", Supplier 1=DigiKey, Viewing Angle=152°, Wavelength - Dominant=647nm, Wavelength - Peak=660nm
D11: library part SML-D15YWT86, "LED YELLOW DIFFUSED 1608 SMD", Current - Test=20mA, Device Package="0603 (1608 Metric)", Lens Color=White, Manufacturer="Rohm Semiconductor", Millicandela Rating=224mcd, Supplier Device Package="1608 (0603)", Supplier Part Number 1=SML-D15YWT86DKR-ND, Voltage - Forward (Vf) (Typ)=2.1V, Color=Yellow, componentlink1description=Datasheet, componentlink1url=http://rohmfs.rohm.com/en/products/databook/datasheet/opto/led/chip_mono/sml-d15-e.pdf, componentlink2description="DigiKey Link", componentlink2url=https://www.digikey.com/en/products/detail/rohm-semiconductor/SML-D15YWT86/5822344, Configuration=Standard, Height (Max)=0.65mm, lastupdated="6/3/2024 8:01:10 PM", Lens Size="1.20mm x 0.80mm", Lens Style="Rectangle with Flat Top", Lens Transparency=Diffused, Lifecycle Status=Active, Minimum Order=1, Mounting Type="Surface Mount", Package / Case="0603 (1608 Metric)", packaging=TapeAndReel, Part Number=SML-D15YWT86, Part Status=Active, partid=114, Price=0.06, series=SML-D15, Size / Dimension="1.60mm L x 0.80mm W", Supplier 1=DigiKey, Wavelength - Dominant=590nm
D12: library part SML-D13M8WT86, "LED GREEN DIFFUSED 1608 SMD", Current - Test=20mA, Device Package="0603 (1608 Metric)", Lens Color=White, Manufacturer="Rohm Semiconductor", Millicandela Rating=40mcd, Supplier Device Package="1608 (0603)", Supplier Part Number 1=846-1198-1-ND, Voltage - Forward (Vf) (Typ)=2.2V, Color=Green, componentlink1description=Datasheet, componentlink1url=https://www.rohm.com/datasheet/SML-D12V8W, componentlink2description="DigiKey Link", componentlink2url=https://www.digikey.com/en/products/detail/rohm-semiconductor/SML-D13M8WT86/4004597, Configuration=Standard, Height (Max)=0.65mm, lastupdated="6/3/2024 7:58:53 PM", Lens Size="1.20mm x 0.80mm", Lens Style="Rectangle with Flat Top", Lens Transparency=Diffused, Lifecycle Status=Active, Minimum Order=1, Mounting Type="Surface Mount", Package / Case="0603 (1608 Metric)", packaging=TapeAndReel, Part Number=SML-D13M8WT86, Part Status=Active, partid=617, Price=0.04, series=EXCELED™, Size / Dimension="1.60mm L x 0.80mm W", Supplier 1=DigiKey, Wavelength - Dominant=572nm
D13: library part "LB Q39G-L2OO-35-1", "LED BLUE DIFFUSED 0603 SMD", Current - Test=5mA, Device Package="0603 (1608 Metric)", Lens Color=White, Manufacturer="OSRAM Opto Semiconductors Inc.", Millicandela Rating=29.5mcd, Supplier Device Package=0603, Supplier Part Number 1=475-2816-1-ND, Voltage - Forward (Vf) (Typ)=2.85V, Color=Blue, componentlink1description=Datasheet, componentlink1url=//media.digikey.com/pdf/Data%20Sheets/Osram%20PDFs/LB_Q39G_v1.4_9-1-15.pdf, componentlink2description="DigiKey Link", componentlink2url=https://www.digikey.com/en/products/detail/osram-opto-semiconductors-inc/LB-Q39G-L2OO-35-1/2176322, Configuration=Standard, Height (Max)=0.40mm, lastupdated="6/3/2024 7:57:52 PM", Lens Size="1.10mm x 0.80mm", Lens Style="Rectangle with Flat Top", Lens Transparency=Diffused, Lifecycle Status=Active, Minimum Order=1, Mounting Type="Surface Mount", Package / Case="0603 (1608 Metric)", packaging=TapeAndReel, Part Number="LB Q39G-L2OO-35-1", Part Status=Active, partid=832, Price=0.06, series="CHIPLED 0603", Size / Dimension="1.60mm L x 0.80mm W", Supplier 1=DigiKey, Viewing Angle="155°, 135°", Wavelength - Dominant=470nm, Wavelength - Peak=472nm
D14: library part IN-S42ATY, "LED YELLOW CLEAR 0402 SMD", Current - Test=20mA, Device Package="0402 (1005 Metric)", Lens Color=Clear, Manufacturer=Inolux, Millicandela Rating=145mcd, Supplier Device Package=0402, Supplier Part Number 1=1830-1059-1-ND, Voltage - Forward (Vf) (Typ)=1.9V, Color=Yellow, componentlink1description=Datasheet, componentlink1url=http://www.inolux-corp.com/datasheet/SMDLED/Mono%20Color%20Top%20View/IN-S42AT%20Series_V1.1.pdf, componentlink2description="DigiKey Link", componentlink2url=https://www.digikey.com/en/products/detail/inolux/IN-S42ATY/7604964, Configuration=Standard, Height (Max)=0.55mm, lastupdated="6/3/2024 8:00:47 PM", Lens Size="0.60mm x 0.45mm", Lens Style="Rectangle with Flat Top", Lens Transparency=Clear, Lifecycle Status=Active, Minimum Order=1, Mounting Type="Surface Mount", Package / Case="0402 (1005 Metric)", packaging=TapeAndReel, Part Number=IN-S42ATY, Part Status=Active, partid=165, Price=0.05, series=IN-S42AT, Size / Dimension="1.00mm L x 0.50mm W", Supplier 1=DigiKey, Viewing Angle=130°, Wavelength - Dominant=592nm, Wavelength - Peak=593nm
D15: library part XZBBR68W5MAV-3, "LED BLUE CLEAR 0402 SMD", Current - Test=5mA, Device Package="0402 (1005 Metric)", Lens Color=Colorless, Manufacturer=SunLED, Millicandela Rating=27mcd, Supplier Device Package=0402, Supplier Part Number 1=1497-1388-1-ND, Voltage - Forward (Vf) (Typ)=2.9V, Color=Blue, componentlink1description=Datasheet, componentlink1url=https://www.sunledusa.com/products/spec/XZBBR68W5MAV-3.pdf, componentlink2description="DigiKey Link", componentlink2url=http://digikey.com/product-detail/en/sunled/XZBBR68W5MAV-3/1497-1388-1-ND/8259065, Configuration=Standard, Height (Max)=0.25mm, lastupdated="6/3/2024 7:57:32 PM", Lens Size="0.60mm x 0.50mm", Lens Style="Rectangle with Flat Top", Lens Transparency=Clear, Lifecycle Status=Active, Minimum Order=1, Mounting Type="Surface Mount", Package / Case="0402 (1005 Metric)", packaging=TapeAndReel, Part Number=XZBBR68W5MAV-3, Part Status=Active, partid=854, Price=0.15, series=-, Size / Dimension="1.00mm L x 0.50mm W", Supplier 1=DigiKey, Viewing Angle=140°, Wavelength - Dominant=467nm, Wavelength - Peak=461nm
H2 H3 H4 H5 H7 H8: "Cắm", Chung_Loai=Cắm, Don_Vi=Con
  H2: Ma_Hang=MH001283, Ten_Linh_Kien="Header 2P XH2.54-2P Đực Thẳng"
  H3 H4 H7 H8: Ma_Hang=MH001292, Ten_Linh_Kien="Header 3P XH2.54-3P Đực Thẳng"
  H5: Ma_Hang=MH001310, Ten_Linh_Kien="Header 4P XH2.54-4P Đực Cong"
J: "USB Type-C Connector", Package=None, Availability=Warning, DigiKey-Purchase-URL=https://snapeda.com/shop?store=DigiKey&id=4629247, MF="Stewart Connector", Mouser-Purchase-URL=https://snapeda.com/shop?store=Mouser&id=4629247, MP=SS-52400-002, Price=None, SnapEDA_Link=https://www.snapeda.com/parts/SS-52400-002/Stewart%20Connector/view-part/4629247/?ref=snap
JP1: library part "JP 1x3 2.54 Cai Cong", "Cắm", Chung_Loai=Cắm, Don_Vi=Con, Ma_Hang=MH001265, Ten_Linh_Kien="Jump Đơn Cái 2.54MM 1x40P Cong"
JP2: library part "JP 2x4 2.54 Cai Thang", "Cắm", Chung_Loai=Cắm, Don_Vi=Con, Ma_Hang=MH008647, Ten_Linh_Kien="Jump Đôi Cái 2.54MM 2x20P Thẳng"
JP4: library part "JP 1x3 2.54 Cai Thang", "Cắm", Chung_Loai=Cắm, Don_Vi=Con, Ma_Hang=MH004006, Ten_Linh_Kien="Jump Đơn Cái 2.54MM 1x20P Thẳng"
R1 R3 R5 R6: library part CRGCQ0603F680R, "RES 680 OHM 1% 1/10W 0603", Device Package="0603 (1608 Metric)", Manufacturer="TE Connectivity Passive Product", Operating Temperature="-55°C ~ 155°C", Power (Watts)="0.1W, 1/10W", Ratings=AEC-Q200, Supplier Device Package=0603, Supplier Part Number 1=A129686CT-ND, Temperature Coefficient=±100ppm/°C, Tolerance=±1%, componentlink1description=Datasheet, componentlink1url=https://www.te.com/commerce/DocumentDelivery/DDEController?Action=srchrtrv&DocNm=1773204-3&DocType=DS&DocLang=English, componentlink2description="DigiKey Link", componentlink2url=https://www.digikey.com/en/products/detail/te-connectivity-passive-product/CRGCQ0603F680R/8576288, Composition="Thick Film", Features="Automotive AEC-Q200, Moisture Resistant", Height - Seated (Max)="0.022\" (0.55mm)", lastupdated="2/9/2024 8:42:15 PM", Lifecycle Status=Active, Minimum Order=1, Number of Terminations=2, Package / Case="0603 (1608 Metric)", packaging=TapeAndReel, Part Number=CRGCQ0603F680R, Part Status=Active, partid=23982, Price=0.01, Resistance="680 Ohms", series=CRGCQ, Size / Dimension="0.063\" L x 0.031\" W (1.60mm x 0.80mm)", Supplier 1=DigiKey
R2: library part ERJ-PB6D3302V, "RES SMD 33K OHM 0.5% 1/4W 0805", Device Package="0805 (2012 Metric)", Manufacturer="Panasonic Electronic Components", Operating Temperature="-55°C ~ 155°C", Power (Watts)="0.25W, 1/4W", Ratings=AEC-Q200, Supplier Device Package=0805, Supplier Part Number 1=P21190CT-ND, Temperature Coefficient=±50ppm/°C, Tolerance=±0.5%, componentlink1description=Datasheet, componentlink1url=https://industrial.panasonic.com/cdbs/www-data/pdf/RDM0000/AOA0000C328.pdf, componentlink2description="DigiKey Link", componentlink2url=https://www.digikey.com/en/products/detail/panasonic-electronic-components/ERJ-PB6D3302V/6213973, Composition="Thick Film", Features="Automotive AEC-Q200, Pulse Withstanding", Height - Seated (Max)="0.028\" (0.70mm)", lastupdated="2/8/2024 9:01:39 PM", Lifecycle Status=Active, Minimum Order=1, Number of Terminations=2, Package / Case="0805 (2012 Metric)", packaging=TapeAndReel, Part Number=ERJ-PB6D3302V, Part Status=Active, partid=41719, Price=0.02, Resistance="33 kOhms", series=ERJ-PB6, Size / Dimension="0.079\" L x 0.049\" W (2.00mm x 1.25mm)", Supplier 1=DigiKey
R4 R10: library part CRCW060310K0FHEAP, "RES SMD 10K OHM 1% 1/10W 0603", Device Package="0603 (1608 Metric)", Manufacturer="Vishay Dale", Operating Temperature="-55°C ~ 155°C", Power (Watts)="0.1W, 1/10W", Ratings=AEC-Q200, Supplier Device Package=0603, Supplier Part Number 1=541-CRCW060310K0FHEAPCT-ND, Temperature Coefficient=±50ppm/°C, Tolerance=±1%, componentlink1description=Datasheet, componentlink1url=http://www.vishay.com/docs/20036/dcrcwpe3.pdf, componentlink2description="DigiKey Link", componentlink2url=https://www.digikey.com/en/products/detail/vishay-dale/CRCW060310K0FHEAP/5070668, Composition="Thick Film", Features="Automotive AEC-Q200", Height - Seated (Max)="0.020\" (0.50mm)", lastupdated="2/9/2024 8:41:44 PM", Lifecycle Status=Active, Minimum Order=1, Number of Terminations=2, Package / Case="0603 (1608 Metric)", packaging=TapeAndReel, Part Number=CRCW060310K0FHEAP, Part Status=Active, partid=56447, Price=0.03, Resistance="10 kOhms", series=CRCW-P, Size / Dimension="0.063\" L x 0.033\" W (1.60mm x 0.85mm)", Supplier 1=DigiKey
R7: library part CRT0603-FY-47R0ELF, "RES SMD 47 OHM 1% 1/10W 0603", Device Package="0603 (1608 Metric)", Manufacturer="Bourns Inc.", Operating Temperature="-55°C ~ 155°C", Power (Watts)="0.1W, 1/10W", Supplier Device Package=0603, Supplier Part Number 1=118-CRT0603-FY-47R0ELFCT-ND, Temperature Coefficient=±25ppm/°C, Tolerance=±1%, componentlink1description=Datasheet, componentlink1url=https://www.bourns.com/docs/Product-Datasheets/crt.pdf, componentlink2description="DigiKey Link", componentlink2url=https://www.digikey.com/en/products/detail/bourns-inc/CRT0603-FY-47R0ELF/4698664, Composition="Thin Film", Features="Current Sense", Height - Seated (Max)="0.024\" (0.60mm)", lastupdated="2/9/2024 8:41:00 PM", Lifecycle Status=Active, Minimum Order=1, Number of Terminations=2, Package / Case="0603 (1608 Metric)", packaging=TapeAndReel, Part Number=CRT0603-FY-47R0ELF, Part Status=Active, partid=71867, Price=0.02, Resistance="47 Ohms", series=CRT, Size / Dimension="0.061\" L x 0.031\" W (1.55mm x 0.80mm)", Supplier 1=DigiKey
R8: library part CR0603AJ/-000ELF, "RES 0 OHM JUMPER 1/10W 0603", Device Package="0603 (1608 Metric)", Manufacturer="Bourns Inc.", Operating Temperature="-55°C ~ 155°C", Power (Watts)="0.1W, 1/10W", Ratings=AEC-Q200, Supplier Device Package=0603, Supplier Part Number 1=118-CR0603AJ/-000ELFCT-ND, Tolerance=Jumper, componentlink1description=Datasheet, componentlink1url=https://www.bourns.com/docs/product-datasheets/cr-a.pdf?sfvrsn=2c9541f6_8, componentlink2description="DigiKey Link", componentlink2url=https://www.digikey.com/en/products/detail/bourns-inc/CR0603AJ-000ELF/12091355, Composition="Thick Film", Features="Automotive AEC-Q200", Height - Seated (Max)="0.022\" (0.55mm)", lastupdated="2/9/2024 8:41:39 PM", Lifecycle Status=Active, Minimum Order=1, Number of Terminations=2, Package / Case="0603 (1608 Metric)", packaging=CutTape, Part Number=CR0603AJ/-000ELF, Part Status=Active, partid=63970, Price=0.01, Resistance="0 Ohms", series=CRxxxxA, Size / Dimension="0.063\" L x 0.031\" W (1.60mm x 0.80mm)", Supplier 1=DigiKey
R9: library part CRCW080547K5FKEA, "RES SMD 47.5K OHM 1% 1/8W 0805", Device Package="0805 (2012 Metric)", Manufacturer="Vishay Dale", Operating Temperature="-55°C ~ 155°C", Power (Watts)="0.125W, 1/8W", Ratings=AEC-Q200, Supplier Device Package=0805, Supplier Part Number 1=541-47.5KCCT-ND, Temperature Coefficient=±100ppm/°C, Tolerance=±1%, componentlink1description=Datasheet, componentlink1url=http://www.vishay.com/docs/20035/dcrcwe3.pdf, componentlink2description="DigiKey Link", componentlink2url=https://www.digikey.com/en/products/detail/vishay-dale/CRCW080547K5FKEA/1175828, Composition="Thick Film", Features="Automotive AEC-Q200", Height - Seated (Max)="0.020\" (0.50mm)", lastupdated="2/8/2024 9:02:17 PM", Lifecycle Status=Active, Minimum Order=1, Number of Terminations=2, Package / Case="0805 (2012 Metric)", packaging=TapeAndReel, Part Number=CRCW080547K5FKEA, Part Status=Active, partid=32688, Price=0.01, Resistance="47.5 kOhms", series=CRCW, Size / Dimension="0.079\" L x 0.049\" W (2.00mm x 1.25mm)", Supplier 1=DigiKey
R11 R12: library part RNCS0805BKE10K0, "RES 10K OHM 0.1% 1/10W 0805", Device Package="0805 (2012 Metric)", Manufacturer="Stackpole Electronics Inc", Operating Temperature="-55°C ~ 155°C", Power (Watts)="0.1W, 1/10W", Ratings=AEC-Q200, Supplier Device Package=0805, Supplier Part Number 1=RNCS0805BKE10K0CT-ND, Temperature Coefficient=±25ppm/°C, Tolerance=±0.1%, componentlink1description=Datasheet, componentlink1url=https://www.seielect.com/catalog/sei-rncs_rnch.pdf, componentlink2description="DigiKey Link", componentlink2url=https://www.digikey.com/en/products/detail/stackpole-electronics-inc/RNCS0805BKE10K0/1800067, Composition="Thin Film", Features="Anti-Corrosive, Automotive AEC-Q200, Moisture Resistant", Height - Seated (Max)="0.026\" (0.65mm)", lastupdated="2/8/2024 9:02:39 PM", Lifecycle Status=Active, Minimum Order=1, Number of Terminations=2, Package / Case="0805 (2012 Metric)", packaging=TapeAndReel, Part Number=RNCS0805BKE10K0, Part Status=Active, partid=27713, Price=0.07, Resistance="10 kOhms", series=RNCS, Size / Dimension="0.079\" L x 0.049\" W (2.00mm x 1.25mm)", Supplier 1=DigiKey
R13 R14: library part CRCW0603680RFKEA, "RES SMD 680 OHM 1% 1/10W 0603", Device Package="0603 (1608 Metric)", Manufacturer="Vishay Dale", Operating Temperature="-55°C ~ 155°C", Power (Watts)="0.1W, 1/10W", Ratings=AEC-Q200, Supplier Device Package=0603, Supplier Part Number 1=541-680HCT-ND, Temperature Coefficient=±100ppm/°C, Tolerance=±1%, componentlink1description=Datasheet, componentlink1url=http://www.vishay.com/docs/20035/dcrcwe3.pdf, componentlink2description="DigiKey Link", componentlink2url=https://www.digikey.com/en/products/detail/vishay-dale/CRCW0603680RFKEA/1174649, Composition="Thick Film", Features="Automotive AEC-Q200", Height - Seated (Max)="0.020\" (0.50mm)", lastupdated="2/9/2024 8:43:05 PM", Lifecycle Status=Active, Minimum Order=1, Number of Terminations=2, Package / Case="0603 (1608 Metric)", packaging=CutTape, Part Number=CRCW0603680RFKEA, Part Status=Active, partid=12674, Price=0.01, Resistance="680 Ohms", series=CRCW, Size / Dimension="0.061\" L x 0.033\" W (1.55mm x 0.85mm)", Supplier 1=DigiKey
R15: library part CRCW060310K0FKEA, "RES SMD 10K OHM 1% 1/10W 0603", Device Package="0603 (1608 Metric)", Manufacturer="Vishay Dale", Operating Temperature="-55°C ~ 155°C", Power (Watts)="0.1W, 1/10W", Ratings=AEC-Q200, Supplier Device Package=0603, Supplier Part Number 1=541-10.0KHCT-ND, Temperature Coefficient=±100ppm/°C, Tolerance=±1%, componentlink1description=Datasheet, componentlink1url=http://www.vishay.com/docs/20035/dcrcwe3.pdf, componentlink2description="DigiKey Link", componentlink2url=https://www.digikey.com/en/products/detail/vishay-dale/CRCW060310K0FKEA/1174782, Composition="Thick Film", Features="Automotive AEC-Q200", Height - Seated (Max)="0.020\" (0.50mm)", lastupdated="2/9/2024 8:42:10 PM", Lifecycle Status=Active, Minimum Order=1, Number of Terminations=2, Package / Case="0603 (1608 Metric)", packaging=CutTape, Part Number=CRCW060310K0FKEA, Part Status=Active, partid=24636, Price=0.01, Resistance="10 kOhms", series=CRCW, Size / Dimension="0.061\" L x 0.033\" W (1.55mm x 0.85mm)", Supplier 1=DigiKey
R16 R17 R22 R23: library part CR0603-FX-4701ELF, "RES SMD 4.7K OHM 1% 1/10W 0603", Device Package="0603 (1608 Metric)", Manufacturer="Bourns Inc.", Operating Temperature="-55°C ~ 155°C", Power (Watts)="0.1W, 1/10W", Supplier Device Package=0603, Supplier Part Number 1=CR0603-FX-4701ELFCT-ND, Temperature Coefficient=±100ppm/°C, Tolerance=±1%, componentlink1description=Datasheet, componentlink1url=https://www.bourns.com/docs/Product-Datasheets/CHPREZTR.pdf, componentlink2description="DigiKey Link", componentlink2url=https://www.digikey.com/en/products/detail/bourns-inc/CR0603-FX-4701ELF/3740916, Composition="Thick Film", Features="Moisture Resistant", Height - Seated (Max)="0.022\" (0.55mm)", lastupdated="2/9/2024 8:42:33 PM", Lifecycle Status=Active, Minimum Order=1, Number of Terminations=2, Package / Case="0603 (1608 Metric)", packaging=CutTape, Part Number=CR0603-FX-4701ELF, Part Status=Active, partid=21073, Price=0.01, Resistance="4.7 kOhms", series=CR0603, Size / Dimension="0.063\" L x 0.031\" W (1.60mm x 0.80mm)", Supplier 1=DigiKey
R18 R19: library part RMCF0603FT5R11, "RES 5.11 OHM 1% 1/10W 0603", Device Package="0603 (1608 Metric)", Manufacturer="Stackpole Electronics Inc", Operating Temperature="-55°C ~ 155°C", Power (Watts)="0.1W, 1/10W", Ratings=AEC-Q200, Supplier Device Package=0603, Supplier Part Number 1=738-RMCF0603FT5R11CT-ND, Temperature Coefficient=±200ppm/°C, Tolerance=±1%, componentlink1description=Datasheet, componentlink1url=https://www.seielect.com/catalog/sei-rmcf_rmcp.pdf, componentlink2description="DigiKey Link", componentlink2url=https://www.digikey.com/en/products/detail/stackpole-electronics-inc/RMCF0603FT5R11/1714085, Composition="Thick Film", Features="Automotive AEC-Q200", Height - Seated (Max)="0.022\" (0.55mm)", lastupdated="2/9/2024 8:42:17 PM", Lifecycle Status=Active, Minimum Order=1, Number of Terminations=2, Package / Case="0603 (1608 Metric)", packaging=CutTape, Part Number=RMCF0603FT5R11, Part Status=Active, partid=23818, Price=0.01, Resistance="5.11 Ohms", series=RMCF, Size / Dimension="0.061\" L x 0.031\" W (1.55mm x 0.80mm)", Supplier 1=DigiKey
R20 R21: library part SG73S1JTTD4701F, "RES 4.7K OHM 1% 1/5W 0603", Device Package="0603 (1608 Metric)", Manufacturer="KOA Speer Electronics, Inc.", Operating Temperature="-55°C ~ 155°C", Power (Watts)="0.2W, 1/5W", Ratings=AEC-Q200, Supplier Device Package=0603, Supplier Part Number 1=2019-SG73S1JTTD4701FCT-ND, Temperature Coefficient=±100ppm/°C, Tolerance=±1%, componentlink1description=Datasheet, componentlink1url=https://www.koaspeer.com/pdfs/SG73S.pdf, componentlink2description="DigiKey Link", componentlink2url=https://www.digikey.com/en/products/detail/koa-speer-electronics-inc/SG73S1JTTD4701F/10289615, Composition="Thick Film", Features="Automotive AEC-Q200, Moisture Resistant, Pulse Withstanding", Height - Seated (Max)="0.022\" (0.55mm)", lastupdated="2/9/2024 8:40:42 PM", Lifecycle Status=Active, Minimum Order=1, Number of Terminations=2, Package / Case="0603 (1608 Metric)", packaging=TapeAndReel, Part Number=SG73S1JTTD4701F, Part Status=Active, partid=77387, Price=0.01, Resistance="4.7 kOhms", series=SG73S, Size / Dimension="0.063\" L x 0.031\" W (1.60mm x 0.80mm)", Supplier 1=DigiKey
S1: "Switch", LatestRevisionDate=17-Jul-2002, LatestRevisionNote="Re-released for DXP Platform.", PackageReference=SPST-2, Published=24-Mar-1999, Publisher="Altium Limited"